# EAGLE board GPIO_Audio_DLT (EAGLE 9.4.2)
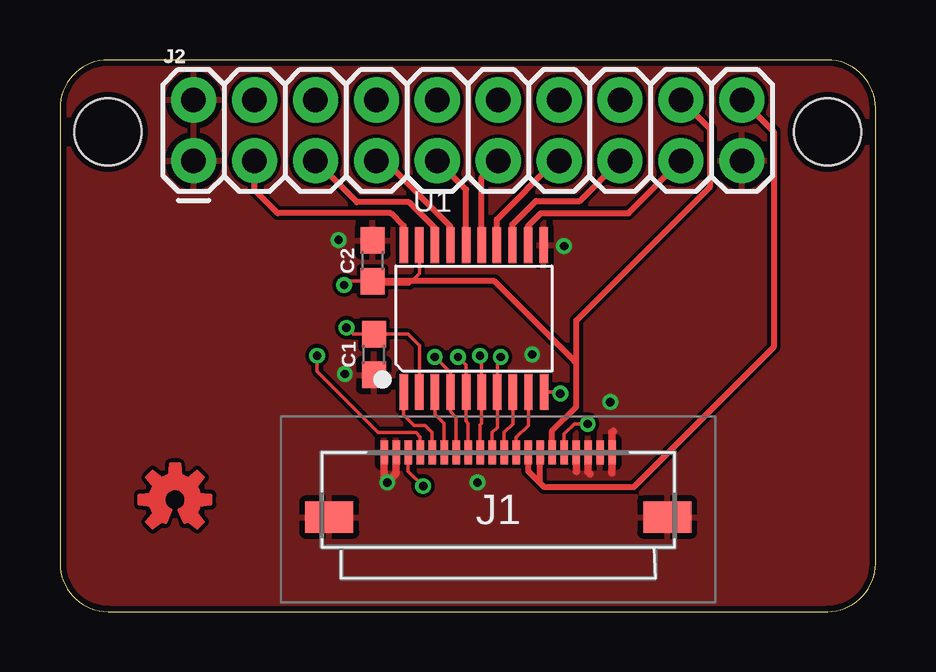
[diagram p0: board, top side]
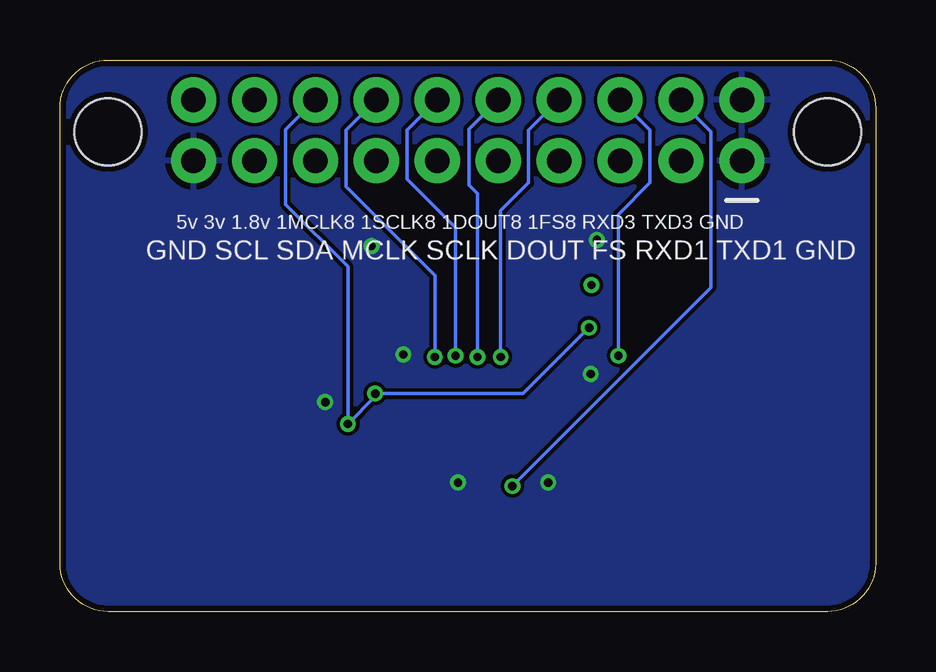
[diagram p1: board, bottom side, seen from below]

Size 34 x 23 mm. Coordinates in mm from the lower left corner, seen from the top.
Outline: 0,21 0,2 arc90 2,0 32,0 arc90 34,2 34,21 arc90 32,23 2,23 arc90 0,21
Copper layers (1*16): Top 0.035mm / dielectric 1.5mm / Bottom 0.035mm
Design rules "SeeedStudio_2layer_DRU_no_angle_20140221": minimum track width 6mil, minimum drill 12mil, track to track 6mil, track to pad 6mil, pad to pad 6mil, via to via 6mil, smd to smd 0mil, copper to edge 10mil, drill to drill 10mil, minimum pad ring 10mil, minimum via ring 6mil, stop-mask expansion 2mil, vias tented up to drill 100mil, thermal gap 10mil
Holes 2.8 mm at 2,20 32,20

## Footprints (pad centres in the part's own frame; a part is rotated, then mirrored left to right if it is on the bottom)
0603 = smd 1.1 x 1: 1 -0.85,0; 2 0.85,0
5051102091 = smd 0.3 x 1: 1 -4.75,2.625; 2 -4.25,2.625; 3 -3.75,2.625; 4 -3.25,2.625; 5 -2.75,2.625; 6 -2.25,2.625; 7 -1.75,2.625; 8 -1.25,2.625; 9 -0.75,2.625; 10 -0.25,2.625; 11 0.25,2.625; 12 0.75,2.625; 13 1.25,2.625; 14 1.75,2.625; 15 2.25,2.625; 16 2.75,2.625; 17 3.25,2.625; 18 3.75,2.625; 19 4.25,2.625; 20 4.75,2.625 | smd 2 x 1.3: MP1 -7.05,-0.075; MP2 7.05,-0.075
2X10 = drill 1.016 pad 1.88: 1 0,0; 2 0,2.54; 3 2.54,0; 4 2.54,2.54; 5 5.08,0; 6 5.08,2.54; 7 7.62,0; 8 7.62,2.54; 9 10.16,0; 10 10.16,2.54; 11 12.7,0; 12 12.7,2.54; 13 15.24,0; 14 15.24,2.54; 15 17.78,0; 16 17.78,2.54; 17 20.32,0; 18 20.32,2.54; 19 22.86,0; 20 22.86,2.54
TSSOP20-0.65-6.5X4.4MM = smd 0.35 x 1.5: 1 -2.925,-3.065; 2 -2.275,-3.065; 3 -1.625,-3.065; 4 -0.975,-3.065; 5 -0.325,-3.065; 6 0.325,-3.065; 7 0.975,-3.065; 8 1.625,-3.065; 9 2.275,-3.065; 10 2.925,-3.065; 11 2.91,3.065; 12 2.26,3.065; 13 1.61,3.065; 14 0.96,3.065; 15 0.325,3.065; 16 -0.325,3.065; 17 -0.975,3.065; 18 -1.625,3.065; 19 -2.275,3.065; 20 -2.925,3.065

## Placement (x,y rotation side)
C1  0.1uF  [0603]  13.09,10.72 90 top
C2  0.1uF  [0603]  13.04,14.63 90 top
J1  505110-2091  [5051102091]  18.27,4.01 0 top
J2  [2X10]  5.57,18.79 0 top
LOGO1  OSHW-LOGOS-COPPER  [OSHW-LOGO-S_COPPER]  4.8,4.66 0 top
U1  TXS0108EPWR-TSSOP20  [TSSOP20-0.65-6.5X4.4MM]  17.25,12.22 0 top

## Library data of the parts
C1 C2 = SparkFun-Capacitors; PROD_ID: CAP-00867
J1 = SamacSys_Parts; DESCRIPTION: MOLEX - 505110-2091 - CONNECTOR, FFC/FPC, 20POS, 1ROW, 0.5MM; HEIGHT: 2.1mm; MANUFACTURER_NAME: Molex; MANUFACTURER_PART_NUMBER: 505110-2091; MOUSER_PART_NUMBER: 538-505110-2091; MOUSER_PRICE-STOCK: https://www.mouser.com/Search/Refine.aspx?Keyword=538-505110-2091
J2 = SparkFun-Connectors
LOGO1 = SparkFun-Aesthetics
U1 = OPL_IC; MPN: TXS0108EPWR

## Nets
1.8V: C1.2 J1.16 J2.16 U1.2 U1.10
3.3V: C2.1 J1.15 J2.18 U1.19
5V: J1.13 J1.14 J2.20
AUD_MCLK: J1.10 J2.14 U1.7
AUD_MCLK_3V: J2.13 U1.14
DAP4_DOUT: J1.8 J2.10 U1.5
DAP4_DOUT_3V: J2.9 U1.16
DAP4_FS: J1.7 J2.8 U1.4
DAP4_FS_3V: J2.7 U1.17
DAP4_SCLK: J1.9 J2.12 U1.6
DAP4_SCLK_3V: J2.11 U1.15
GEN3_I2C_SCL: J1.12 U1.9
GEN3_I2C_SCL_3V: J2.17 U1.12
GEN3_I2C_SDA: J1.11 U1.8
GEN3_I2C_SDA_3V: J2.15 U1.13
GND: C1.1 C2.2 J1.1 J1.2 J1.17 J1.18 J1.19 J1.20 J1.MP1 J1.MP2 J2.1 J2.2 J2.19 U1.11
UART1_RX: J1.6 U1.3
UART1_RX_3V: J2.5 U1.18
UART1_TX: J1.5 U1.1
UART1_TX_3V: J2.3 U1.20
UART3_RXD: J1.4 J2.6
UART3_TXD: J1.3 J2.4

## Tracks (layer width: path | path; a pad name or v marks a point on that pad's centre or on a via)
1.8V  (via drill 0.35)
  Top 0.152: 20.18,8.98 U1.10 20.8,9.15 v20.86,9.09 | U1.2 14.98,11.1 14.51,11.57 C1.2 12.21,11.57 12.04,11.74 v11.95,11.84 | J1.16 21.02,7.41 21.44,7.82 v22,7.82
  Bottom 0.152: v11.95,11.84 14.69,9.09 v20.86,9.09 20.86,8.96 v22,7.82 22,14.38 24.59,16.97 24.59,20.1 J2.16
3.3V  (via drill 0.35)
  Top 0.152: U1.19 14.98,14.09 14.56,13.65 13.16,13.65 C2.1 12.99,13.78 12.01,13.78 v11.84,13.61
  Top 0.254: J1.15 20.52,7.53 21.52,8.53 21.52,10.36 | 21.52,10.36 21.45,10.44 18.1,13.78 12.99,13.78 | 21.52,10.36 21.52,12.14 27.11,17.73 27.11,20.11 J2.18
5V
  Top 0.254: J2.20 29.75,20.01 29.75,11.02 23.91,5.18 20.2,5.18 | 20.2,5.18 20.02,5.36 J1.14 | J1.13 19.52,5.86 20.2,5.18
AUD_MCLK  (via drill 0.35)
  Top 0.152: J1.10 18.02,7.47 18.23,7.68 U1.7 18.23,10.47 v18.37,10.62
  Bottom 0.152: v18.37,10.62 18.37,14.02 22.08,17.73 22.08,20.06 J2.14
AUD_MCLK_3V
  Top 0.254: U1.14 18.21,16.35 20.66,18.79 J2.13
DAP4_DOUT  (via drill 0.35)
  Top 0.152: J1.8 17.02,7.85 16.93,7.94 U1.5 16.93,10.28 v16.59,10.62
  Bottom 0.152: v16.59,10.62 16.59,17.42 16.95,17.78 16.95,20.11 J2.10
DAP4_DOUT_3V
  Top 0.254: U1.16 16.93,17.59 J2.9
DAP4_FS  (via drill 0.35)
  Top 0.152: J1.7 16.52,8.1 16.28,8.34 U1.4 16.28,9.96 v15.63,10.62
  Bottom 0.152: v15.63,10.62 15.63,16.71 14.46,17.88 14.46,20.06 J2.8
DAP4_FS_3V
  Top 0.254: U1.17 16.28,16.06 13.55,18.79 J2.7
DAP4_SCLK  (via drill 0.35)
  Top 0.152: J1.9 17.52,7.78 17.58,7.84 U1.6 17.58,10.6 v17.51,10.67
  Bottom 0.152: v17.51,10.67 17.51,16 19.54,18.03 19.54,20.06 J2.12
DAP4_SCLK_3V
  Top 0.254: U1.15 17.58,18.1 J2.11
GEN3_I2C_SCL
  Top 0.152: J1.12 19.02,7.25 19.53,7.76 U1.9
GEN3_I2C_SCL_3V
  Top 0.254: U1.12 19.51,16.08 20.05,16.61 23.71,16.61 J2.17
GEN3_I2C_SDA
  Top 0.152: J1.11 18.52,7.46 18.88,7.82 U1.8
GEN3_I2C_SDA_3V
  Top 0.254: U1.13 18.86,16.14 19.84,17.12 21.67,17.12 J2.15
GND  (via drill 0.35)
  Top 0.305: 23.01,5.79 23.02,5.8 J1.20 23.02,7.48 23.06,7.52 | J1.17 21.54,6.62 21.54,5.84 | J1.18 22.02,5.82 22.1,5.74 | J1.1 13.52,5.51 v13.65,5.38 14.02,5.76 J1.2
  other vias: 11.62,15.49 11.87,9.9 21.01,15.24 19.69,10.72 17.41,5.38 22.94,8.74
  pour Top: -1,26 36,26 36,-1 -1,-1
  pour Bottom: -2,27 37,27 37,-2 -2,-2
UART1_RX
  Top 0.152: U1.3 15.63,8.23 16.02,7.84 J1.6
UART1_RX_3V
  Top 0.254: U1.18 15.63,16 14.56,17.07 12.38,17.07 J2.5
UART1_TX
  Top 0.152: U1.1 14.33,8.21 14.77,7.77 15.22,7.77 15.52,7.47 J1.5
UART1_TX_3V
  Top 0.254: U1.20 14.33,16.08 13.8,16.61 9.08,16.61 8.11,17.57 J2.3
UART3_RXD  (via drill 0.35)
  Top 0.152: J1.4 15.02,7.28 14.84,7.47 14.64,7.47 13.26,7.47 10.72,10.01 v10.72,10.67
  Bottom 0.152: v10.72,10.67 10.72,16.56 9.4,17.88 9.4,20.08 J2.6
UART3_TXD  (via drill 0.35)
  Top 0.152: v15.14,5.23 14.52,5.85 J1.3
  Bottom 0.152: J2.4 8.11,21.27 6.86,20.02 6.86,13.51 v15.14,5.23

## Text on the board
bPlace: 5v 3v 1.8v 1MCLK8 1SCLK8 1DOUT8 1FS8 RXD3 TXD3 GND | GND SCL SDA MCLK SCLK DOUT FS RXD1 TXD1 GND
tStop: GPIO/ / AUDIO